# EAGLE board PCB_Global2 (EAGLE 9.6.2)
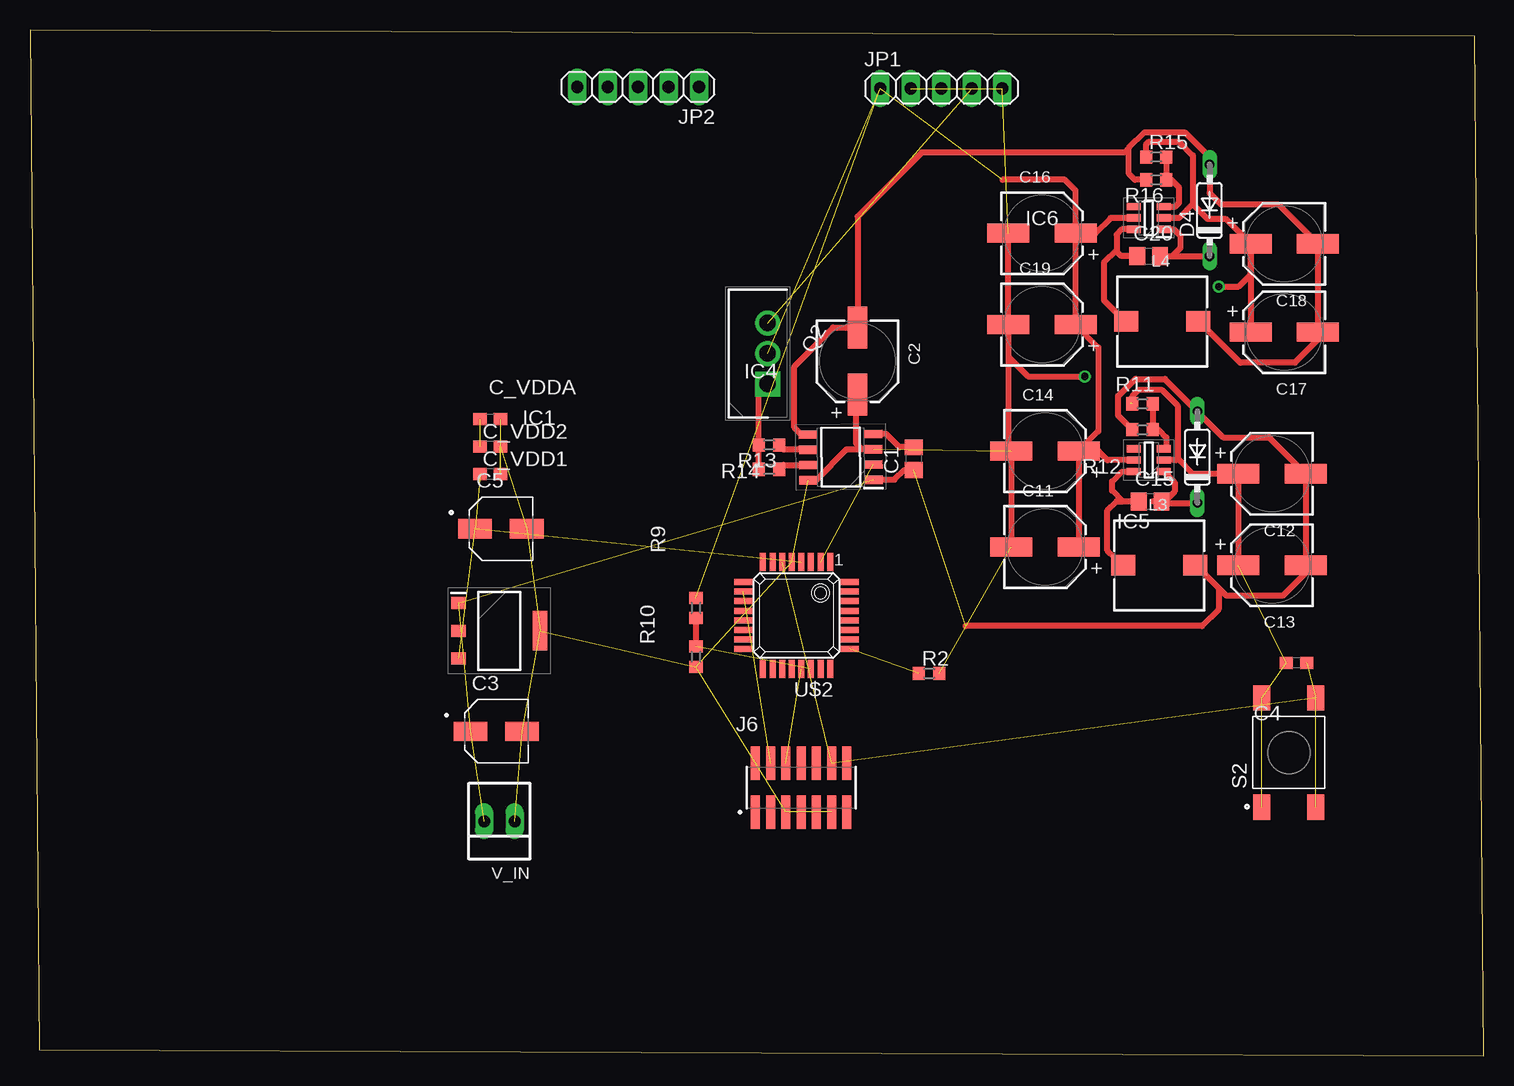
[diagram p0: board, top side]
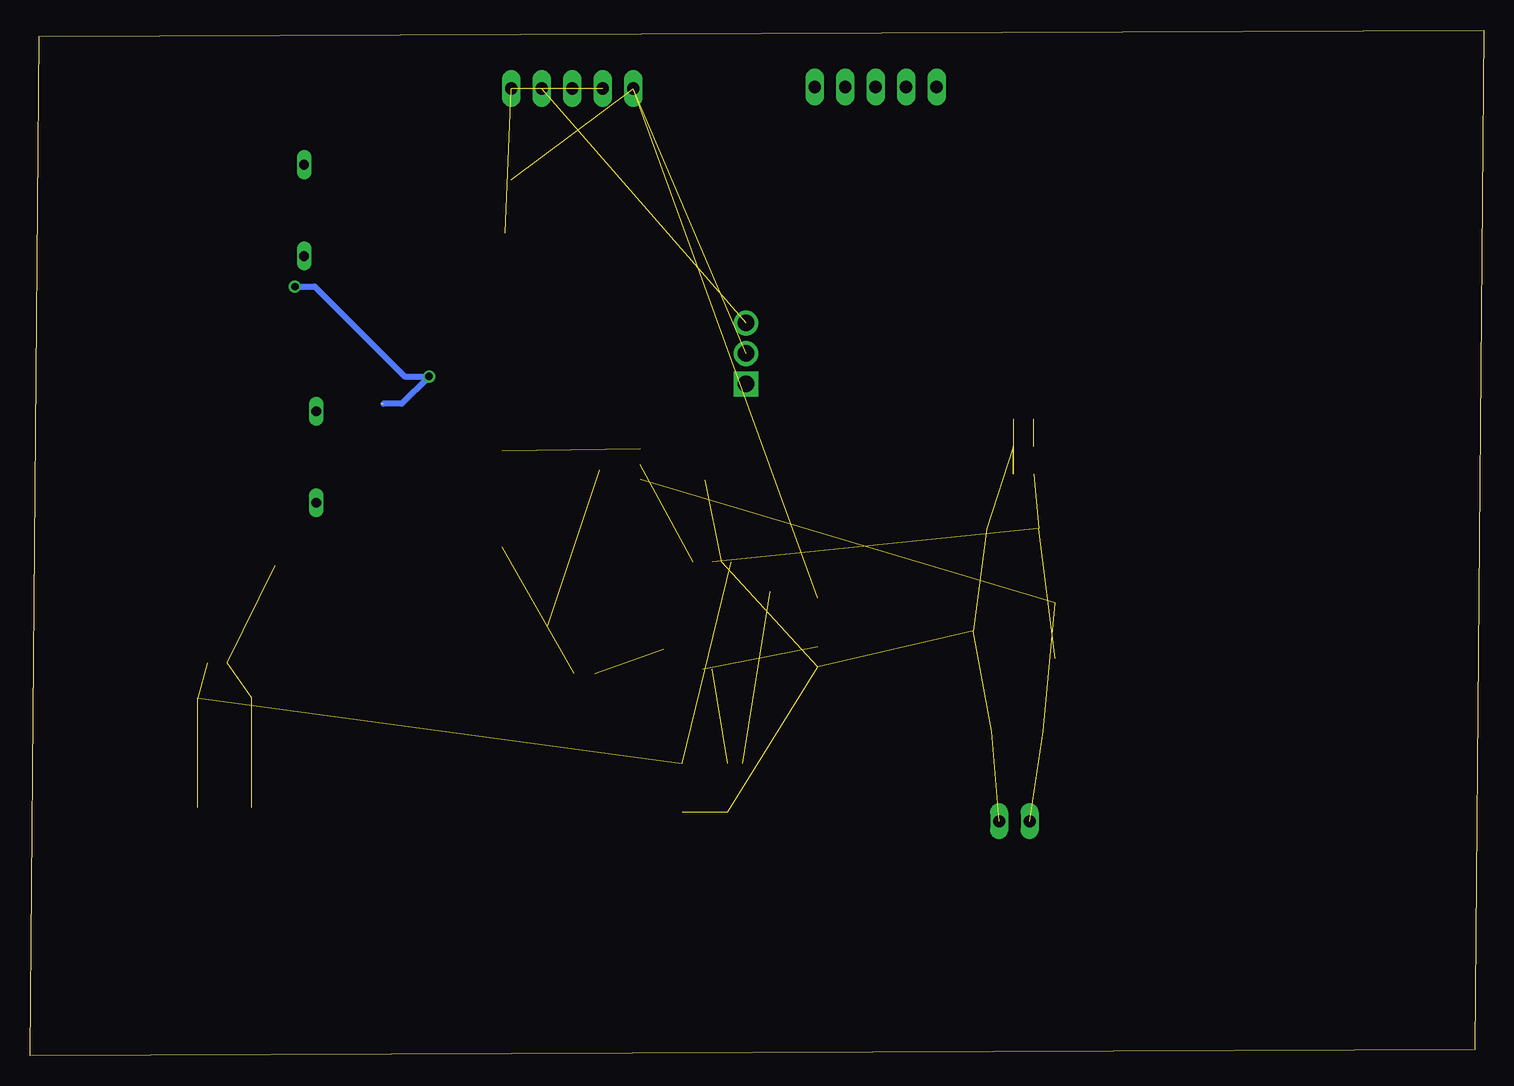
[diagram p1: board, bottom side, seen from below]

Size 121.14 x 85.52 mm. Coordinates in mm from the lower left corner, seen from the top.
Outline: 0.76,0.51 121.14,0 120.38,85.01 0,85.52 0.76,0.51
Copper layers (1*16): Top 0.035mm / dielectric 1.5mm / Bottom 0.035mm
Design rules "fixhregle *": minimum track width 0.2mm, minimum drill 0.6mm, track to track 0.3mm, track to pad 0.3mm, pad to pad 0.3mm, via to via 0.3mm, smd to smd 0.185mm, copper to edge 1mm, drill to drill 0.4mm, minimum pad ring 0.2mm, minimum via ring 0.2mm, stop-mask expansion 4mil, vias tented up to drill 0mil, thermal gap 0.4mm

## Footprints (pad centres in the part's own frame; a part is rotated, then mirrored left to right if it is on the bottom)
C0805 = smd 1.3 x 1.5: 1 -0.95,0; 2 0.95,0
WCAP-ASLI_6.3X7.7(DXL) = smd 3.5 x 1.6: 1 2.8,0; 2 -2.8,0
CAP_EEEHP1C100R = smd 2.8 x 1.6: 1 -2.15,0; 2 2.15,0
C0603 = smd 1.1 x 1: 1 -0.85,0; 2 0.85,0
DO35-7 = drill 0.813 long: A 3.81,0; C -3.81,0
SOT230P700X175-4N = smd 1.2 x 1: 1 -3.4,2.3; 2 -3.4,0; 3 -3.4,-2.3 | smd 1.2 x 3.3: 4 3.4,0
SOIC127P600X175-8N = smd 1.525 x 0.7: 1 -2.712,1.905; 2 -2.712,0.635; 3 -2.712,-0.635; 4 -2.712,-1.905; 5 2.712,-1.905; 6 2.712,-0.635; 7 2.712,0.635; 8 2.712,1.905
SOT95P280X145-6N = smd 1.15 x 0.6: 1 -1.25,0.95; 2 -1.25,0; 3 -1.25,-0.95; 4 1.25,-0.95; 5 1.25,0; 6 1.25,0.95
SAMTEC_FTSH-107-01-L-DV = smd 0.74 x 2.79: 01 -3.81,-2.035; 02 -3.81,2.035; 03 -2.54,-2.035; 04 -2.54,2.035; 05 -1.27,-2.035; 06 -1.27,2.035; 07 0,-2.035; 08 0,2.035; 09 1.27,-2.035; 10 1.27,2.035; 11 2.54,-2.035; 12 2.54,2.035; 13 3.81,-2.035; 14 3.81,2.035
1X05 = drill 1.016 long: 1 -5.08,0; 2 -2.54,0; 3 0,0; 4 2.54,0; 5 5.08,0
WE-PD_7345R = smd 2 x 1.7: 1 -3,0; 2 3,0
TO254P483X1016X1994-3P = drill 1.38 pad 2.07 square: 1 0,0 | drill 1.38 pad 2.07: 2 2.54,0; 3 5.08,0
R0603 = smd 1 x 1.1: 1 -0.85,0; 2 0.85,0
SW_2-1437565-7 = smd 2.1 x 1.4: 1 -4.55,2.25; 2 4.55,2.25; 3 -4.55,-2.25; 4 4.55,-2.25
QFP32_STM32 = smd 0.5 x 1.5: 1 -2.8,-4.45; 2 -2,-4.45; 3 -1.2,-4.45; 4 -0.4,-4.45; 5 0.4,-4.45; 6 1.2,-4.45; 7 2,-4.45; 8 2.8,-4.45; 17 2.8,4.45; 18 2,4.45; 19 1.2,4.45; 20 0.4,4.45; 21 -0.4,4.45; 22 -1.2,4.45; 23 -2,4.45; 24 -2.8,4.45 | smd 1.5 x 0.5: 9 4.45,-2.8; 10 4.45,-2; 11 4.45,-1.2; 12 4.45,-0.4; 13 4.45,0.4; 14 4.45,1.2; 15 4.45,2; 16 4.45,2.8; 25 -4.45,2.8; 26 -4.45,2; 27 -4.45,1.2; 28 -4.45,0.4; 29 -4.45,-0.4; 30 -4.45,-1.2; 31 -4.45,-2; 32 -4.45,-2.8
22-23-2021 = drill 1 long: 1 -1.27,0; 2 1.27,0

## Placement (x,y rotation side)
C1  100n  [C0805]  73.66,49.78 90 top
C2  10 µF  [WCAP-ASLI_6.3X7.7(DXL)]  68.96,57.91 270 top
C3  EEEHP1C100R  [CAP_EEEHP1C100R]  38.86,27.05 0 top
C4  0.1uF  [C0603]  105.54,32.77 180 top
C5  EEEHP1C100R  [CAP_EEEHP1C100R]  39.24,43.94 0 top
C11  10 µF  [WCAP-ASLI_6.3X7.7(DXL)]  84.58,42.42 0 top
C12  10 µF  [WCAP-ASLI_6.3X7.7(DXL)]  103.5,48.51 180 top
C13  10 µF  [WCAP-ASLI_6.3X7.7(DXL)]  103.5,40.89 180 top
C14  10 µF  [WCAP-ASLI_6.3X7.7(DXL)]  84.58,50.42 0 top
C15  100n  [C0805]  93.34,46.23 0 top
C16  10 µF  [WCAP-ASLI_6.3X7.7(DXL)]  84.33,68.58 0 top
C17  10 µF  [WCAP-ASLI_6.3X7.7(DXL)]  104.52,60.33 180 top
C18  10 µF  [WCAP-ASLI_6.3X7.7(DXL)]  104.52,67.69 180 top
C19  10 µF  [WCAP-ASLI_6.3X7.7(DXL)]  84.33,60.96 0 top
C20  100n  [C0805]  93.22,66.67 0 top
C_VDD1  100nF  [C0603]  38.35,48.51 0 top
C_VDD2  100nF  [C0603]  38.35,50.8 0 top
C_VDDA  100nF  [C0603]  38.35,53.09 0 top
D3  1N4148DO35-7  [DO35-7]  97.28,49.91 90 top
D4  1N4148DO35-7  [DO35-7]  98.3,70.48 90 top
IC1  NCV33375ST3.3T3G  [SOT230P700X175-4N]  39.12,35.43 0 top
IC4  1EDI20N12AF  [SOIC127P600X175-8N]  67.56,49.91 180.5 top
IC5  MCP16331T-E_CH  [SOT95P280X145-6N]  93.22,49.66 180 top
IC6  MCP16331T-E_CH  [SOT95P280X145-6N]  93.22,69.85 180 top
J6  FTSH-107-01-L-DV  [SAMTEC_FTSH-107-01-L-DV]  64.26,22.35 0 top
JP1  [1X05]  75.95,80.64 0 top
JP2  [1X05]  50.67,80.77 180 top
L3  15uH  [WE-PD_7345R]  94.11,40.89 0 top
L4  15uH  [WE-PD_7345R]  94.36,61.21 0 top
Q2  IRFB7530PBF  [TO254P483X1016X1994-3P]  61.47,56.01 90 top
R2  100k  [R0603]  74.93,31.88 0 top
R9  250k  [R0603]  55.5,37.34 90 top
R10  10k  [R0603]  55.5,33.27 90 top
R11  10k  [R0603]  92.71,54.36 0 top
R12  52.3k  [R0603]  92.71,52.2 180 top
R13  10  [R0603]  61.59,50.93 180 top
R14  3.3  [R0603]  61.59,48.9 180 top
R15  10k  [R0603]  93.85,74.93 0 top
R16  112k  [R0603]  93.85,73.02 180 top
S2  2-1437565-7  [SW_2-1437565-7]  104.9,25.27 90 top
U$2  STM32G030K6T6  [QFP32_STM32]  63.88,36.7 180 top
V_IN  22-23-2021  [22-23-2021]  39.12,19.56 180 top

## Library data of the parts
C1 C4 C15 C20 C_VDD1 C_VDD2 C_VDDA = rcl; SPICEPREFIX: C
C2 C11-C14 C16-C19 = Eagle_WCAP-ASLI (rev20a); DATASHEET-URL: https://www.we-online.com/catalog/datasheet/865080845005.pdf; DF: 10%; DIAMETER: 6.3mm; I-LEAK: 10uA; I-RIPPLE: 35mA; L: 7.7mm; OPERATING-TEMPERATURE: -55 °C up to +105 °C; PART-NUMBER: 865080845005; TECHNICAL-REFERENCE: ASED077100M100DVCTCB000; VR: 100V(DC)
C3 C5 = EEEHP1C100R; AVAILABILITY: In Stock; DESCRIPTION: Cap Aluminum Lytic 10uF 16V 20% (5 X 5.8mm) SMD 25mA 2000h 105C Automotive T/R; MF: Panasonic; MP: EEEHP1C100R; PACKAGE: RADIAL-2 Panasonic; PRICE: None; PURCHASE-URL: https://pricing.snapeda.com/search/part/EEEHP1C100R/?ref=eda
D3 D4 = diode
IC1 = NCV33375ST3.3T3G; ARROW_PART_NUMBER: NCV33375ST3.3T3G; ARROW_PRICE-STOCK: https://www.arrow.com/en/products/ncv33375st3.3t3g/on-semiconductor?region=nac; DESCRIPTION: ON SEMICONDUCTOR - NCV33375ST3.3T3G - Fixed LDO Voltage Regulator, 4.3V to 13V, 260mV Dropout, 3.3Vout, 300mAout, SOT-223-4; HEIGHT: 1.75mm; MANUFACTURER_NAME: onsemi; MANUFACTURER_PART_NUMBER: NCV33375ST3.3T3G; MOUSER_PART_NUMBER: 863-NCV33375ST3.3T3G; MOUSER_PRICE-STOCK: https://www.mouser.co.uk/ProductDetail/ON-Semiconductor/NCV33375ST33T3G?qs=Pqj8oIac8rWOl%252BM3OwXrOg%3D%3D
IC4 = 1EDI20N12AF; DESCRIPTION: Gate Drivers 1200V Isolated 1-CH, 3.5A,Separate Output; HEIGHT: 1.75mm; MANUFACTURER_NAME: Infineon; MANUFACTURER_PART_NUMBER: 1EDI20N12AF; MOUSER_PART_NUMBER: 726-1EDI20N12AF; MOUSER_PRICE-STOCK: https://www.mouser.co.uk/ProductDetail/Infineon-Technologies/1EDI20N12AF?qs=Fdzd9GSp%252BASr8JSo1G1nbg%3D%3D
IC5 IC6 = MCP16331T-E_CH; ARROW_PART_NUMBER: MCP16331T-E/CH; ARROW_PRICE-STOCK: https://www.arrow.com/en/products/mcp16331t-ech/microchip-technology?region=nac; DESCRIPTION: 50V 500mA Adj. Switch Regulator SOT23-6 Microchip, MCP16331T-E/CH Step-Down Switching Regulator 1.2A Adjustable, 2 24 V, 6-Pin SOT-23; HEIGHT: 1.45mm; MANUFACTURER_NAME: Microchip; MANUFACTURER_PART_NUMBER: MCP16331T-E/CH; MOUSER_PART_NUMBER: 579-MCP16331T-E/CH; MOUSER_PRICE-STOCK: https://www.mouser.co.uk/ProductDetail/Microchip-Technology/MCP16331T-E-CH?qs=rQCxX1QmdjIpfF%2FjMAUv9A%3D%3D
J6 = FTSH-107-01-L-DV; MANUFACTURER: Samtec; PARTREV: R; STANDARD: Manufacturer Recommendations
JP1 JP2 = pinhead
L3 L4 = Eagle_WE-PD (rev20a)(1); DATASHEET-URL: https://www.we-online.com/catalog/datasheet/7447779115.pdf; FRES: 19.5MHz; IR: 1.6A; ISAT: 2.2A; MOUNT: SMT; PART-NUMBER: 7447779115; RDC-MAX: 81mOhm; RDC-TYP: 70mOhm; VERSION: Robust
Q2 = IRFB7530PBF; ARROW_PART_NUMBER: IRFB7530PBF; ARROW_PRICE-STOCK: https://www.arrow.com/en/products/irfb7530pbf/infineon-technologies-ag; DESCRIPTION: Infineon IRFB7530PBF N-channel MOSFET, 195 A, 60 V StrongIRFET, 3-Pin TO-220AB; HEIGHT: 4.83mm; MANUFACTURER_NAME: Infineon; MANUFACTURER_PART_NUMBER: IRFB7530PBF; MOUSER_PART_NUMBER: 942-IRFB7530PBF; MOUSER_PRICE-STOCK: https://www.mouser.co.uk/ProductDetail/Infineon-IR/IRFB7530PBF?qs=a7rcPCEf1Q%2FFGrR%252BNclv%2FQ%3D%3D
R2 R9-R16 = rcl; SPICEPREFIX: R
S2 = 2-1437565-7; AVAILABILITY: In Stock; COMMENT: 2-1437565-7; CONFIGURATION_POLE-THROW: Single Pole - Single Throw; CONTACT_CURRENT_RATING: 50 mA; DESCRIPTION: Tactile Switch SPST-NO Top Actuated Surface Mount; MF: TE Connectivity; MP: FSM2JSMA; PACKAGE: None; PRICE: None; PURCHASE-URL: https://pricing.snapeda.com/search/part/FSM2JSMA/?ref=eda
U$2 = STM32G030K6T6; AVAILABILITY: In Stock; DESCRIPTION: ARM® Cortex®-M0+ series Microcontroller IC 32-Bit Single-Core 64MHz 32KB (32K x 8) FLASH 32-LQFP (7x7); MF: STMicroelectronics; MP: STM32G030K6T6; PACKAGE: LQFP-32 STMicroelectronics; PRICE: None; PURCHASE-URL: https://pricing.snapeda.com/search/part/STM32G030K6T6/?ref=eda
V_IN = con-molex; MF: MOLEX; MPN: 22-23-2021; OC_FARNELL: 1462926; OC_NEWARK: 25C3832

## Nets
CMD: IC4.2 U$2.2
GND: C2.1 C3.2 C4.2 C5.2 C11.2 C12.1 C13.1 C14.2 C16.2 C17.1 C18.1 C19.2 C_VDD1.2 C_VDD2.2 C_VDDA.2 IC1.4 IC4.3 IC4.8 IC5.2 IC6.2 J6.05 J6.07 J6.11 JP1.2 JP1.5 R2.2 R10.1 R11.1 R15.1 S2.1 S2.2 U$2.5 V_IN.1
I2C: R9.1 R10.2 U$2.22
MCC_OUTPUT: C11.1 C14.1 C16.1 C19.1 IC5.5 IC6.5 JP1.1 Q2.2 R9.2
N$1: IC4.6 R13.1
N$2: IC4.7 R14.1
N$5: IC1.2
N$6: C_VDD2.1 C_VDDA.1
N$7: C1.2 IC4.4
N$8: U$2.27
N$9: U$2.32
N$10: U$2.29
N$11: U$2.30
N$12: U$2.1
N$14: U$2.18
N$15: R2.1 U$2.25
N$17: C15.1 IC5.6 L3.1
N$18: Q2.1 R13.2 R14.2
N$21: C15.2 D3.C IC5.1
N$22: IC5.3 R11.2 R12.1
N$27: C20.1 IC6.6 L4.1
N$29: C20.2 D4.C IC6.1
N$30: IC6.3 R15.2 R16.1
NRST: C4.1 J6.12 S2.3 S2.4 U$2.6
RD: JP1.4 Q2.3
SWCLK: J6.06 U$2.21
SWDIO: J6.04 U$2.10
USART2_RX: J6.13
USART2_TX: J6.14
VCC5: C1.1 C3.1 C12.2 C13.2 D3.A IC1.1 IC4.1 L3.2 R12.2 V_IN.2
VCC12: C2.2 C17.2 C18.2 D4.A IC4.5 L4.2 R16.2
VCC33: C5.1 C_VDD1.1 IC1.3 U$2.4
VDD: J6.03

## Tracks (layer width: path | path; a pad name or v marks a point on that pad's centre or on a via)
CMD  (1 unrouted)
GND  (via drill 0.6)  (20 unrouted)
  Top 0.5: R15.1 93,75.98 93.22,76.2 95.76,76.2 96.9,75.06 | C19.2 C16.2
  Top 0.508: C18.1 99.63,69.79 98.11,69.79 96.9,70.99 | 96.9,75.06 96.9,70.99 | 96.9,70.99 95.76,69.85 IC6.2 | C18.1 C17.1 | C19.2 81.53,58.3 | 81.53,58.3 83.19,56.64 v87.88,56.64 | v99.06,64.14 100.71,64.14 101.72,65.14 C18.1 | C13.1 C12.1 96.9,48.51 95.76,49.66 95.5,49.66 | C11.2 C14.2 81.53,50.67 81.53,58.3 | 95.5,49.66 IC5.2 | R11.1 91.86,54.99 92.37,55.5 94.36,55.5 95.63,54.23 95.63,49.78 95.5,49.66 | IC4.3 69.32,50.57 | 69.32,50.57 68.83,51.05 68.83,54.99 C2.1 | IC4.8 64.88,47.97 65.47,47.97 68.07,50.57 69.32,50.57
  Bottom 0.508: 99.15,64.14 v99.06,64.14 97.41,64.14 89.92,56.64 v87.88,56.64 90.17,54.36 91.69,54.36
I2C  (1 unrouted)
  Top 0.508: R9.1 R10.2
MCC_OUTPUT  (3 unrouted)
  Top 0.5: IC6.5 90.04,69.85 88.77,68.58 C16.1 | C19.1 C16.1 | C16.1 87.13,72.13 86.23,73.02 81.03,73.02
  Top 0.508: IC5.5 89.78,49.66 89.02,50.42 C14.1 | C14.1 C11.1 | C19.1 89.03,59.06 89.03,52.06 C14.1
N$1
  Top 0.508: IC4.6 62.85,50.52 R13.1
N$2
  Top 0.508: R14.1 62.8,49.25 IC4.7
N$6  (1 unrouted)
N$7
  Top 0.508: C1.2 72.46,50.73 71.35,51.84 IC4.4
N$15  (1 unrouted)
N$17
  Top 0.508: C15.1 91.31,46.23 91.06,46.23 | 91.06,46.23 90.17,47.12 90.17,47.88 91,48.71 IC5.6 | L3.1 90.51,41.49 90.43,41.49 89.79,42.13 89.79,45.47 90.55,46.23 91.06,46.23
N$18
  Top 0.508: R14.2 R13.2 60.74,55.28 Q2.1
N$21
  Top 0.508: C15.2 94.39,46.13 94.36,46.1 D3.C | C15.2 94.55,46.23 95.38,47.05 95.38,47.8 IC5.1 | C15.2 93.6,46.23
N$22
  Top 0.508: R11.2 R12.1 94.06,52.2 94.7,51.56 94.7,50.84 IC5.3
N$27
  Top 0.5: IC6.6 91,68.9 90.55,68.45 90.55,67.18 | 90.55,67.18 90.55,67.06 90.93,66.67 C20.1 | L4.1 91.28,61.21 89.5,63 89.5,66.13 90.55,67.18
N$29
  Top 0.5: IC6.1 95.31,68.9 95.89,68.33 | C20.2 D4.C
  Top 0.508: C20.2 95.18,66.67 95.89,67.38 95.89,68.33
N$30
  Top 0.5: IC6.3 95.44,70.8 95.76,71.12 95.76,72.39 95.12,73.02 R16.1 R15.2
NRST  (4 unrouted)
RD  (1 unrouted)
SWCLK  (1 unrouted)
SWDIO  (1 unrouted)
VCC5  (4 unrouted)
  Top 0.508: 99.06,39.02 99.73,38.35 104.39,38.35 106.3,40.27 C13.2 C12.2 103.26,51.56 99.44,51.56 D3.A 94.57,56.43 92.11,56.43 90.68,55.01 90.68,53.38 R12.2 | 99.06,39.02 97.78,40.3 97.7,40.3 L3.2 | 99.06,39.02 99.06,37.21 97.66,35.81 77.98,35.81 | IC4.1 72.03,48.03 72.84,48.83 C1.1
VCC12
  Top 0.5: 97.36,60.78 L4.2 | R16.2 92.08,73.02 91.57,73.53 91.57,75.69 | D4.A 98.3,74.93 96.23,77 92.88,77 91.57,75.69 | 91.19,75.31 91.57,75.69
  Top 0.508: D4.A 98.3,71.93 99.23,70.99 104.01,70.99 C18.2 C17.2 107.32,59.7 105.41,57.79 100.87,57.79 98.04,60.62 97.96,60.62 L4.2 97.54,61.21 | IC4.5 64.29,51.79 63.69,52.39 63.69,57.47 66.94,60.71 C2.2 68.96,69.97 74.3,75.31 91.19,75.31
VCC33  (3 unrouted)